# EAGLE board Schem (EAGLE 7.2.0)
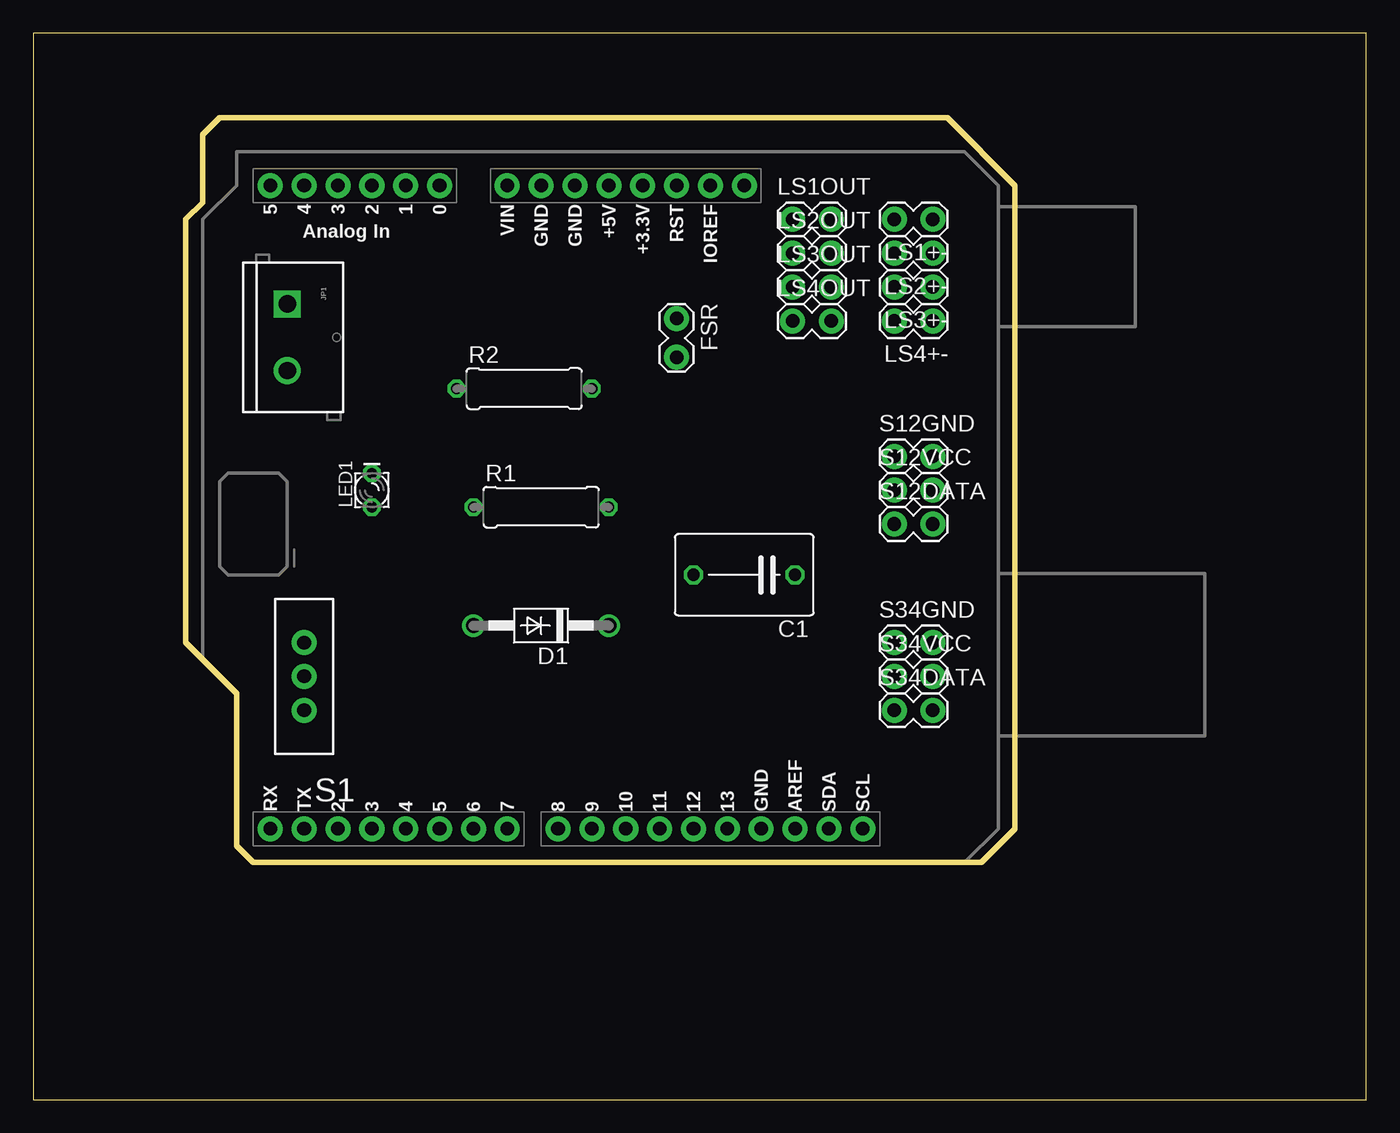
[diagram p0: board, top side]
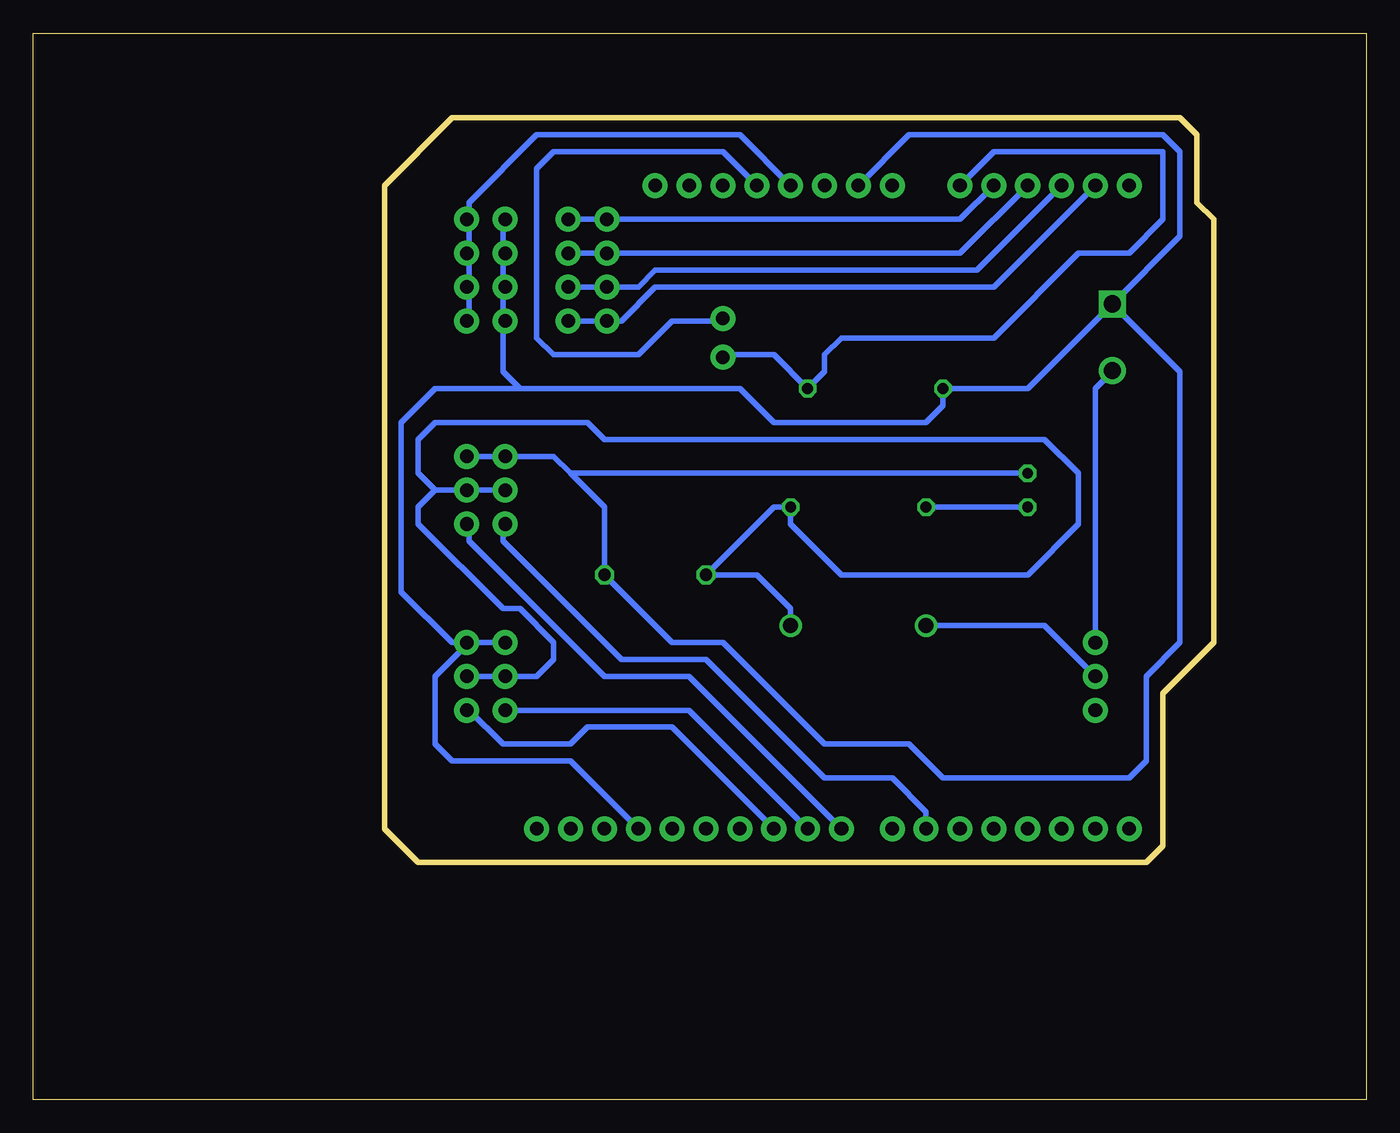
[diagram p1: board, bottom side, seen from below]

Size 100 x 80 mm. Coordinates in mm from the lower left corner, seen from the top.
Outline: 0,0 100,0 100,80 0,80 0,0
Outline: 11.43,34.29 11.43,66.04 12.7,67.31 12.7,72.39 13.97,73.66 68.58,73.66 73.66,68.58 73.66,20.32 71.12,17.78 16.51,17.78 15.24,19.05 15.24,30.48 11.43,34.29
Copper layers (1*16): Top 0.035mm / dielectric 1.5mm / Bottom 0.035mm
Design rules "default": minimum track width 10mil, minimum drill 24mil, track to track 8mil, track to pad 8mil, pad to pad 8mil, via to via 8mil, smd to smd 8mil, copper to edge 40mil, drill to drill 8mil, minimum pad ring 10mil, minimum via ring 8mil, stop-mask expansion 4mil, vias tented up to drill 0mil, thermal gap 10mil

## Footprints (pad centres in the part's own frame; a part is rotated, then mirrored left to right if it is on the bottom)
C075-063X106 = drill 0.914 octagon: 1 -3.81,0; 2 3.81,0
DO41-10 = drill 1.118: A 5.08,0; C -5.08,0
1X02_LOCK = drill 1.016 pad 1.88: 1 -0.178,0; 2 2.718,0
UNO_R3_SHIELD = drill 1.016 pad 1.88: 3.3V 50.8,26.67; 5V 50.8,29.21; A0 50.8,41.91; A1 50.8,44.45; A2 50.8,46.99; A3 50.8,49.53; A4 50.8,52.07; A5 50.8,54.61; AREF 2.54,15.24; D2 2.54,49.53; D3 2.54,46.99; D4 2.54,44.45; D5 2.54,41.91; D6 2.54,39.37; D7 2.54,36.83; D8 2.54,33.02; D9 2.54,30.48; D10 2.54,27.94; D11 2.54,25.4; D12 2.54,22.86; D13 2.54,20.32; GND@0 50.8,31.75; GND@1 50.8,34.29; GND@2 2.54,17.78; IOREF 50.8,21.59; NC 50.8,19.05; RES 50.8,24.13; RX 2.54,54.61; SCL 2.54,10.16; SDA 2.54,12.7; TX 2.54,52.07; VIN 50.8,36.83
SCREWTERMINAL-5MM-2 = drill 1.3 pad 2.032 square: 1 0,0 | drill 1.3 pad 2.032: 2 5,0
LED_LD260 = drill 0.813 octagon: A -1.27,0; K 1.27,0
0309/10 = drill 0.813 octagon: 1 -5.08,0; 2 5.08,0
SWITCH-SPDT = drill 1.016 pad 1.88: 1 0,2.54; 2 0,0; 3 0,-2.54

## Placement (x,y rotation side)
C1  [C075-063X106]  53.34,39.37 180 top
D1  1N4004  [DO41-10]  38.1,35.56 180 top
FSR  [1X02_LOCK]  48.26,58.42 270 top
J1  ARDUINO_R3_SHIELD  [UNO_R3_SHIELD]  72.39,17.78 90 top
JP1  [SCREWTERMINAL-5MM-2]  19.05,59.69 270 top
LED1  [LED_LD260]  25.4,45.72 90 top
LS1+-  [1X02_LOCK]  67.31,66.04 180 top
LS1OUT  [1X02_LOCK]  57.15,66.04 0 top
LS2+-  [1X02_LOCK]  67.31,63.5 180 top
LS2OUT  [1X02_LOCK]  57.15,63.5 0 top
LS3+-  [1X02_LOCK]  67.31,60.96 180 top
LS3OUT  [1X02_LOCK]  57.15,60.96 0 top
LS4+-  [1X02_LOCK]  67.31,58.42 180 top
LS4OUT  [1X02_LOCK]  57.15,58.42 0 top
R1  [0309/10]  38.1,44.45 0 top
R2  [0309/10]  36.83,53.34 0 top
S1  [SWITCH-SPDT]  20.32,31.75 180 top
S12DATA  [1X02_LOCK]  64.77,43.18 0 top
S12GND  [1X02_LOCK]  64.77,48.26 0 top
S12VCC  [1X02_LOCK]  64.77,45.72 0 top
S34DATA  [1X02_LOCK]  64.77,29.21 0 top
S34GND  [1X02_LOCK]  64.77,34.29 0 top
S34VCC  [1X02_LOCK]  64.77,31.75 0 top

## Library data of the parts
C1 R1 R2 = resistor
D1 = diode
FSR LS1+- LS1OUT LS2+- LS2OUT LS3+- LS3OUT LS4+- LS4OUT S12DATA S12GND S12VCC S34DATA S34GND S34VCC = SparkFun-Connectors
J1 = SparkFun-Boards
JP1 = SparkFun-Connectors; STOREFRONT_ID: PRT-08432
LED1 = eagle-ltspice; SPICEMODEL: NONE; SPICEPREFIX: D; SPICETYPE: diode
S1 = SparkFun-Electromechanical; PROD_ID: SWCH-08261

## Nets
GND: C1.1 J1.GND@1 J1.GND@2 JP1.1 LED1.K R2.1
N$1: J1.3.3V
N$3: J1.A2
N$4: J1.A1
N$5: J1.A3
N$6: J1.A4
N$7: C1.2 D1.C R1.2
N$8: J1.5V
N$9: LED1.A R1.1
N$11: D1.A S1.2
N$12: J1.D6
N$13: S1.3
N$15: J1.D9
N$16: J1.D10
S$1: J1.D8
S$3: J1.A0 R2.2

## Tracks (layer width: path | path; a pad name or v marks a point on that pad's centre or on a via)
GND
  Bottom 0.406: 63.5,53.34 46.99,53.34 44.45,50.8 33.02,50.8 31.75,52.07 R2.1 25.4,53.34 JP1.1 | 63.5,53.34 69.85,53.34 72.39,50.8 72.39,38.1 68.58,34.29 67.31,34.29 | JP1.1 13.97,64.77 13.97,71.12 15.24,72.39 34.29,72.39 J1.GND@1 | 67.31,34.29 69.85,31.75 69.85,26.67 68.58,25.4 59.69,25.4 J1.GND@2 | 67.31,34.29 64.77,34.29 | JP1.1 13.97,54.61 13.97,34.29 16.51,31.75 16.51,25.4 17.78,24.13 31.75,24.13 34.29,26.67 40.64,26.67 48.26,34.29 52.07,34.29 C1.1 57.15,44.45 59.69,46.99 | 63.5,53.34 64.77,54.61 64.77,66.04 | LED1.K 59.69,46.99 | 59.69,46.99 60.96,48.26 67.31,48.26
N$1
  Bottom 0.406: J1.3.3V 48.26,71.12 60.96,71.12 62.23,69.85 62.23,57.15 60.96,55.88 54.61,55.88 52.07,58.42 48.26,58.42
N$3
  Bottom 0.406: 59.69,63.5 30.48,63.5 J1.A2
N$4
  Bottom 0.406: 59.69,66.04 30.48,66.04 J1.A1
N$5
  Bottom 0.406: J1.A3 29.21,62.23 53.34,62.23 54.61,60.96 59.69,60.96
N$6
  Bottom 0.406: 59.69,58.42 55.88,58.42 53.34,60.96 27.94,60.96 J1.A4
N$7
  Bottom 0.406: 69.85,45.72 71.12,46.99 71.12,49.53 69.85,50.8 58.42,50.8 57.15,49.53 24.13,49.53 21.59,46.99 21.59,43.18 25.4,39.37 39.37,39.37 43.18,43.18 R1.2 44.45,44.45 C1.2 45.72,39.37 43.18,36.83 D1.C | 69.85,45.72 64.77,45.72 | 69.85,45.72 71.12,44.45 71.12,43.18 64.77,36.83 63.5,36.83 60.96,34.29 60.96,33.02 62.23,31.75 67.31,31.75
N$8
  Bottom 0.406: 67.31,58.42 67.31,64.77 67.31,66.04 67.31,67.31 62.23,72.39 46.99,72.39 J1.5V
N$9
  Bottom 0.406: LED1.A R1.1
N$11
  Bottom 0.406: S1.2 24.13,35.56 D1.A
N$12
  Bottom 0.406: J1.D6 33.02,21.59 35.56,24.13 40.64,24.13 49.53,33.02 55.88,33.02 64.77,41.91 64.77,43.18
N$13
  Bottom 0.406: S1.3 20.32,53.34 19.05,54.61
N$15
  Bottom 0.406: J1.D9 50.8,29.21 64.77,29.21
N$16
  Bottom 0.406: J1.D10 52.07,27.94 58.42,27.94 59.69,26.67 64.77,26.67 67.31,29.21
S$1
  Bottom 0.406: 67.31,43.18 67.31,41.91 57.15,31.75 50.8,31.75 J1.D8
S$3
  Bottom 0.406: 48.26,55.88 44.45,55.88 R2.2 40.64,54.61 40.64,55.88 39.37,57.15 27.94,57.15 21.59,63.5 17.78,63.5 15.24,66.04 15.24,71.12 27.94,71.12 J1.A0